# EAGLE board io-a-1 (EAGLE 9.6.2)
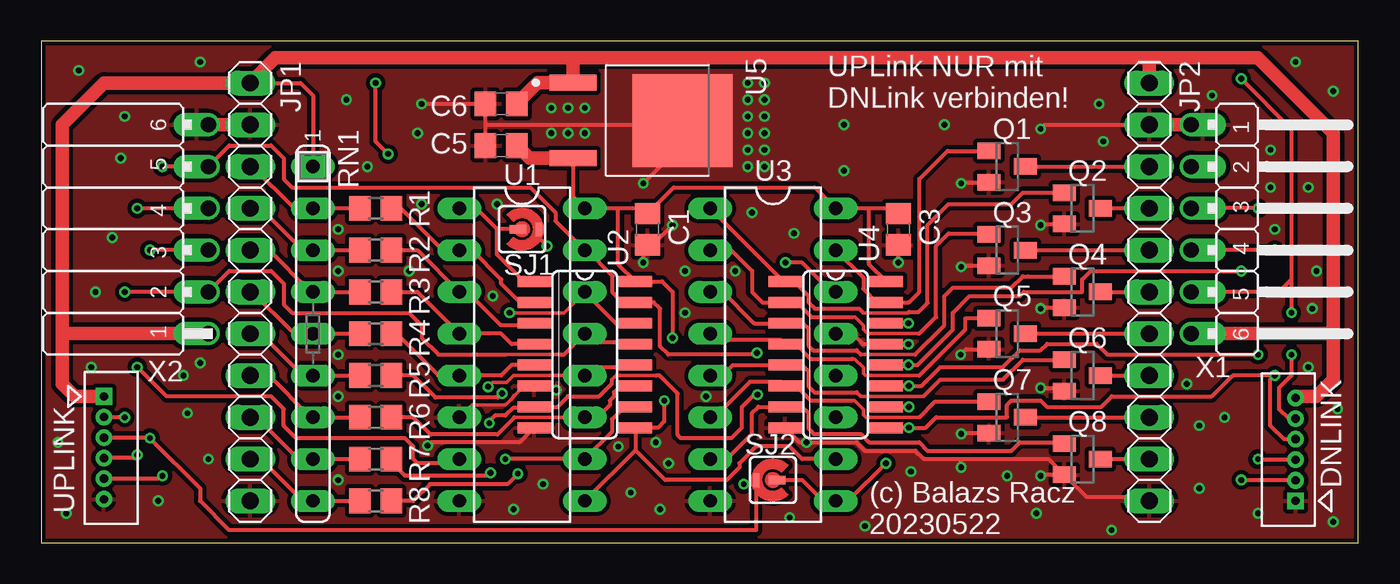
[diagram p0: board, top side]
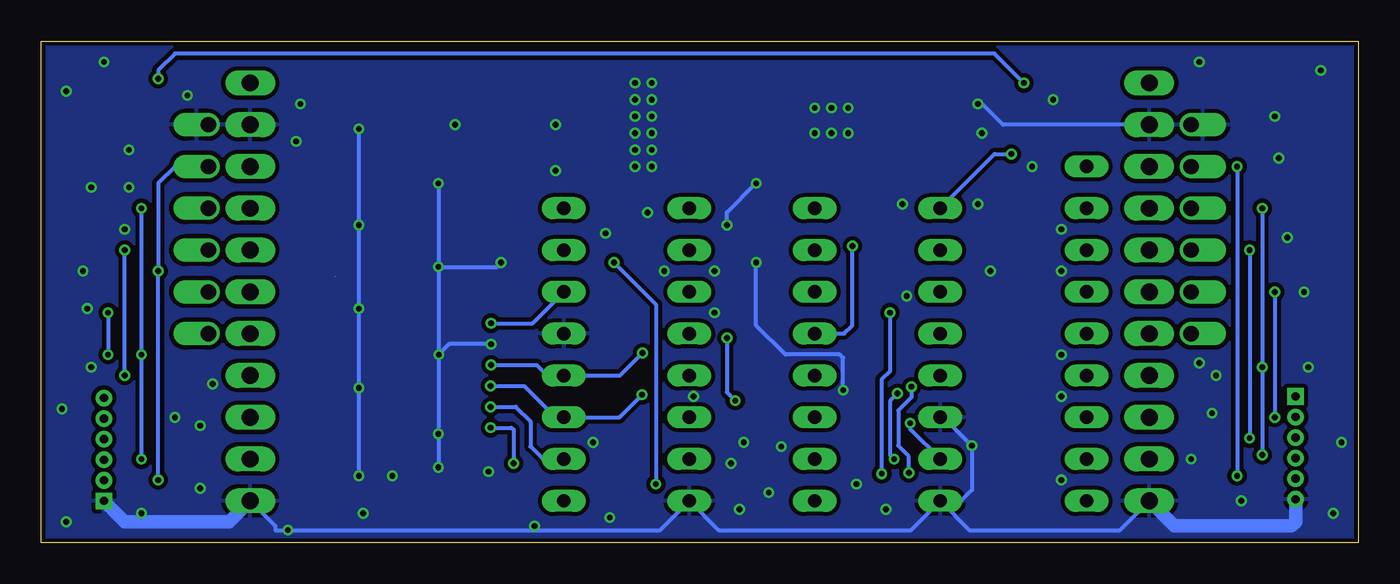
[diagram p1: board, bottom side, seen from below]

Size 80.01 x 30.48 mm. Coordinates in mm from the lower left corner, seen from the top.
Outline: 0,0 80.01,0 80.01,30.48 0,30.47 0,0
Copper layers (1*16): Top 0.035mm / dielectric 1.5mm / Bottom 0.035mm
Design rules "SeeedStudio_2layer_DRU_no_angle_20140221 *": minimum track width 6mil, minimum drill 12mil, track to track 8mil, track to pad 8mil, pad to pad 8mil, via to via 8mil, smd to smd 0mil, copper to edge 10mil, drill to drill 10mil, minimum pad ring 10mil, minimum via ring 6mil, stop-mask expansion 2mil, vias tented up to drill 100mil, thermal gap 10mil

## Footprints (pad centres in the part's own frame; a part is rotated, then mirrored left to right if it is on the bottom)
C0805 = smd 1.3 x 1.5: 1 -0.95,0; 2 0.95,0
1X11 = drill 1.016 long: 1 -12.7,0; 2 -10.16,0; 3 -7.62,0; 4 -5.08,0; 5 -2.54,0; 6 0,0; 7 2.54,0; 8 5.08,0; 9 7.62,0; 10 10.16,0; 11 12.7,0
SOT23 = smd 1 x 1.4: 1 -0.95,-1.1; 2 0.95,-1.1; 3 0,1.1
R0805 = smd 1.3 x 1.5: 1 -0.95,0; 2 0.95,0
SIL9 = drill 0.813 long: 1 -10.16,0; 2 -7.62,0; 3 -5.08,0; 4 -2.54,0; 5 0,0; 6 2.54,0; 7 5.08,0; 8 7.62,0; 9 10.16,0
SJ_RND2 = smd 1.016 x 0.508: P$1 -0.254,0 | smd 0.406 x 0.813: P$2 1.016,0
DIL16 = drill 0.813 long: 1 -8.89,-3.81; 2 -6.35,-3.81; 3 -3.81,-3.81; 4 -1.27,-3.81; 5 1.27,-3.81; 6 3.81,-3.81; 7 6.35,-3.81; 8 8.89,-3.81; 9 8.89,3.81; 10 6.35,3.81; 11 3.81,3.81; 12 1.27,3.81; 13 -1.27,3.81; 14 -3.81,3.81; 15 -6.35,3.81; 16 -8.89,3.81
SO16 = smd 0.66 x 2.032: 1 -4.445,-3.073; 2 -3.175,-3.073; 3 -1.905,-3.073; 4 -0.635,-3.073; 5 0.635,-3.073; 6 1.905,-3.073; 7 3.175,-3.073; 8 4.445,-3.073; 9 4.445,3.073; 10 3.175,3.073; 11 1.905,3.073; 12 0.635,3.073; 13 -0.635,3.073; 14 -1.905,3.073; 15 -3.175,3.073; 16 -4.445,3.073
DPAK229P990X238-4N = smd 0.97 x 2.83: 1 -2.29,-4.14; 3 2.29,-4.14 | smd 5.63 x 6.09: 2 0,2.51
JP6F = drill 0.914 offset: 1 -8.89,0; 2 -6.35,0; 3 -3.81,0; 4 -1.27,0; 5 1.27,0; 6 3.81,0
JP6F-FEM = drill 0.914 offset: 1 -8.89,0; 2 -6.35,0; 3 -3.81,0; 4 -1.27,0; 5 1.27,0; 6 3.81,0
CON_530470610_MOL = drill 0.5 pad 0.85 square: 1 0,0 | drill 0.5 pad 0.85: 2 -1.25,0; 3 -2.5,0; 4 -3.75,0; 5 -5,0; 6 -6.25,0

## Placement (x,y rotation side)
C1  [C0805]  36.83,19.05 270 top
C3  [C0805]  52.07,19.05 270 top
C5  [C0805]  27.94,24.13 180 top
C6  [C0805]  27.94,26.67 180 top
JP1  INPUTS  [1X11]  12.7,15.24 270 top
JP2  OUTPUTS  [1X11]  67.31,15.24 270 top
Q1  BSS123  [SOT23]  58.67,22.86 270 top
Q2  BSS123  [SOT23]  63.25,20.32 270 top
Q3  BSS123  [SOT23]  58.67,17.78 270 top
Q4  BSS123  [SOT23]  63.25,15.24 270 top
Q5  BSS123  [SOT23]  58.67,12.7 270 top
Q6  BSS123  [SOT23]  63.25,10.16 270 top
Q7  BSS123  [SOT23]  58.67,7.62 270 top
Q8  BSS123  [SOT23]  63.25,5.08 270 top
R1  [R0805]  20.32,20.32 180 top
R2  [R0805]  20.32,17.78 180 top
R3  [R0805]  20.32,15.24 180 top
R4  [R0805]  20.32,12.7 180 top
R5  [R0805]  20.32,10.16 180 top
R6  [R0805]  20.32,7.62 180 top
R7  [R0805]  20.32,5.08 180 top
R8  [R0805]  20.32,2.54 180 top
RN1  10K  [SIL9]  16.51,12.7 270 top
SJ1  [SJ_RND2]  29.21,19.05 0 top
SJ2  [SJ_RND2]  44.45,3.81 180 top
U1  74HC166  [DIL16]  29.21,11.43 270 top
U2  74HC166  [SO16]  33.02,11.43 270 top
U3  74HC595  [DIL16]  44.45,11.43 270 top
U4  74HC595  [SO16]  48.26,11.43 270 top
U5  MC7805BDTRKG  [DPAK229P990X238-4N]  36.45,25.65 270 top
X1  DNLINK  [JP6F]  69.85,16.51 270 top
X2  UPLINK  [JP6F-FEM]  10.16,21.59 90 top
X3  MOLEX_530470610CON_530470610_MOL  [CON_530470610_MOL]  3.81,8.89 90 top
X4  MOLEX_530470610CON_530470610_MOL  [CON_530470610_MOL]  76.2,2.54 270 top

## Library data of the parts
C1 C3 C5 C6 = rcl; SPICEPREFIX: C
JP1 JP2 = pinhead
Q1-Q8 = transistor-small-signal
R1-R8 = rcl; SPICEPREFIX: R
RN1 = resistor-sil; OC_FARNELL: unknown; OC_NEWARK: unknown
SJ1 SJ2 U1-U4 = trainlib
U5 = MC7805BDTRKG; MANUFACTURER: ON Semiconductor; PARTREV: 27; STANDARD: IPC-7351B
X1 X2 = eagleparts
X3 X4 = eagleparts; COPYRIGHT: Copyright (C) 2023 Ultra Librarian. All rights reserved.; MANUFACTURER_PART_NUMBER: 530470610; MFR_NAME: Molex Connector Corporation

## Nets
+5V: C1.1 C3.1 C5.1 U1.9 U1.16 U2.9 U2.16 U3.10 U3.16 U4.10 U4.16 U5.3
+12V: C6.1 JP1.1 JP2.1 RN1.1 U5.1 X1.6 X2.1 X3.1 X4.6
GND: C1.2 C3.2 C5.2 C6.2 JP1.2 JP1.11 JP2.2 JP2.11 Q1.2 Q2.2 Q3.2 Q4.2 Q5.2 Q6.2 Q7.2 Q8.2 U1.6 U1.8 U2.6 U2.8 U3.8 U3.13 U4.8 U4.13 U5.2 X1.1 X2.6 X3.6 X4.1
LATCH: U1.15 U2.15 U3.12 U4.12 X1.2 X2.5 X3.5 X4.2
MISO-DN: SJ1.P$1 U1.1 U2.1 X1.5 X4.5
MISO-UP: SJ1.P$2 U1.13 U2.13 X2.2 X3.2
MOSI-DN: SJ2.P$1 U3.9 U4.9 X1.4 X4.4
MOSI-UP: SJ2.P$2 U3.14 U4.14 X2.3 X3.3
N$19: JP2.6 Q4.3
N$20: JP2.5 Q3.3
N$21: JP2.4 Q2.3
N$22: JP2.3 Q1.3
N$27: JP1.3 R1.2 RN1.2
N$28: JP1.4 R2.2 RN1.3
N$29: JP1.5 R3.2 RN1.4
N$30: JP1.6 R4.2 RN1.5
N$31: JP1.7 R5.2 RN1.6
N$32: JP1.8 R6.2 RN1.7
N$33: JP1.9 R7.2 RN1.8
N$34: JP1.10 R8.2 RN1.9
N$35: JP2.7 Q5.3
N$36: JP2.8 Q6.3
N$37: JP2.9 Q7.3
N$38: JP2.10 Q8.3
PA: Q1.1 U3.15 U4.15
PB: Q2.1 U3.1 U4.1
PC: Q3.1 U3.2 U4.2
PD: Q4.1 U3.3 U4.3
PE: Q5.1 U3.4 U4.4
PF: Q6.1 U3.5 U4.5
PG: Q7.1 U3.6 U4.6
PH: Q8.1 U3.7 U4.7
QA: R1.1 U1.2 U2.2
QB: R2.1 U1.3 U2.3
QC: R3.1 U1.4 U2.4
QD: R4.1 U1.5 U2.5
QE: R5.1 U1.10 U2.10
QF: R6.1 U1.11 U2.11
QG: R7.1 U1.12 U2.12
QH: R8.1 U1.14 U2.14
SCK: U1.7 U2.7 U3.11 U4.11 X1.3 X2.4 X3.4 X4.3

## Tracks (layer width: path | path; a pad name or v marks a point on that pad's centre or on a via)
+5V  (via drill 0.35)
  Top 0.254: 36.09,5.61 U2.9 37.47,6.99 37.85,7.37 v37.85,8.64 | 36.09,5.61 U1.9 | 35.05,20.32 U1.16 32.31,21.03 U5.3 | 35.05,20.32 36.51,20.32 C1.1 38.42,21.59 46.99,21.59 U3.16 50.29,20.32 | 35.05,20.32 35.05,16.92 U2.16 37.72,15.88 38.35,15.24 v38.35,12.45 | U4.16 50.29,16.92 50.29,20.32 | 50.29,20.32 51.75,20.32 C3.1 | U4.10 v52.7,8.26 v52.7,8.25 | U3.10 46.23,5.08 45.47,5.84 43.43,5.84 42.42,4.83 42.42,4.57 41.66,3.81 37.9,3.81 36.09,5.61
  Top 0.813: C5.1 29.66,23.36 U5.3
  Bottom 0.254: v52.7,8.25 51.18,8.25 50.29,7.37 50.29,5.84 49.53,5.08 U3.10 | v38.35,12.45 38.35,9.14 v37.85,8.64
+12V
  Top 0.254: JP1.1 15.75,27.94 16.51,27.18 RN1.1
  Top 0.813: X2.1 1.52,12.7 1.27,12.95 | 1.27,12.95 1.27,25.4 3.81,27.94 JP1.1 14.22,29.46 32.06,29.46 | 32.06,29.46 32.31,29.21 U5.1 30.16,27.94 C6.1 | JP2.1 67.31,29.46 | 32.06,29.46 67.31,29.46 | 67.31,29.46 73.91,29.46 78.49,24.89 78.49,12.95 | 78.49,12.95 78.23,12.7 X1.6 | X4.6 76.3,8.89 77.47,8.89 78.49,9.91 78.49,12.95 | X3.1 2.03,8.89 1.27,9.65 1.27,12.95
GND  (via drill 0.35)
  Top 0.203: U1.6 26.16,8.38 28.22,8.38 28.62,8.79 28.62,8.81 29.33,9.53 U2.6
  Top 0.254: U2.8 29.06,6.1 23.67,6.1 v23.47,5.89 | U3.13 49.28,12.7 49.91,12.06 U4.13 v52.68,12.06 v52.68,12.07 | U4.8 46.08,6.1 49.53,6.1 50.04,5.59 53.09,5.59 53.59,5.08 55.88,5.08 | Q8.2 61.2,5.08 55.88,5.08 | U2.6 31.04,9.53 v31.29,9.27 | v36.58,17.02 36.58,17.85 C1.2 37.15,18.1 v38.35,19.3 | v23.11,26.67 C6.2 26.99,25.4 | C5.2 26.99,25.4 | 38.78,25.48 38.7,25.4 26.99,25.4 | 38.78,25.48 U5.2 | v36.58,21.84 38.78,24.05 38.78,25.48 | Q8.2 63.48,2.79 67.06,2.79 JP2.11 | Q1.2 57.51,21.84 v55.88,21.84 | v55.88,16.76 55.95,16.83 Q3.2 | v52.07,17.02 C3.2 | v55.86,11.43 56.18,11.75 Q5.2 | v55.88,6.6 55.95,6.67 Q7.2 | v55.88,4.57 55.88,5.08 | Q8.2 60.77,4.13 v60.71,4.06 | v60.71,9.4 61.96,9.4 Q6.2 | v60.71,14.22 60.77,14.29 Q4.2 | v60.71,19.3 60.77,19.37 Q2.2 | v60.71,25.15 60.96,25.4 JP2.2
  Top 0.813: X2.6 JP1.2 | X1.1 JP2.2
  Bottom 0.254: U1.6 25.2,7.62 v23.47,5.89 23.47,3.2 24.13,2.54 U1.8 | JP2.11 65.79,1.02 65.79,0.76 42.42,0.76 U3.8 38.86,0.76 27.18,0.76 U1.8 | U1.8 23.62,0.76 14.48,0.76 JP1.11 | v31.29,9.27 31.29,11.23 31.5,11.43 34.8,11.43 36.58,13.21 v36.58,17.02 | JP1.2 21.59,25.4 22.86,26.67 v23.11,26.67 | v38.35,19.3 38.35,20.07 v36.58,21.84 | v55.88,21.84 v55.88,16.76 | v55.88,16.76 52.32,16.76 v52.07,17.02 | v55.88,16.76 55.88,11.46 v55.86,11.43 | v55.86,11.43 55.86,6.63 v55.88,6.6 v55.88,4.57 | v60.71,4.06 v60.71,9.4 v60.71,14.22 v60.71,19.3 v60.71,25.15 | v52.68,12.07 55.22,12.07 v55.86,11.43
  Bottom 0.813: JP2.11 68.58,1.27 74.93,1.27 X4.1 | JP1.11 11.18,1.02 4.06,1.02 3.81,1.27 X3.6
  other vias: 42.93,26.92 42.93,25.91 42.93,24.89 42.93,23.88 42.93,22.86 43.94,26.92 43.94,25.91 43.94,24.89 43.94,23.88 43.94,22.86 30.99,26.42 32,26.42 33.02,26.42 30.99,24.89 32,24.89 33.02,24.89 48.77,25.4 54.86,25.4 64.26,26.67 64.52,24.38 18.54,26.92 19.81,22.86 22.86,24.89 5.08,25.91 4.83,23.37 4.32,18.54 2.29,28.7 9.65,29.21 3.3,15.24 9.65,10.92 8.64,10.16 8.89,7.87 10.16,5.08 3.05,10.67 1.02,6.1 1.52,1.78 7.11,2.54 28.7,2.03 30.48,3.56 18.03,3.81 18.03,8.89 18.03,11.43 18.03,16.51 22.35,16.51 18.03,19.05 23.11,20.57 27.69,20.57 27.43,14.99 37.34,6.1 38.1,4.83 35.81,3.05 37.59,2.03 45.47,1.52 50.04,1.02 52.83,4.32 60.45,1.78 65.02,0.76 70.36,7.11 71.88,7.62 70.36,3.3 73.91,1.78 78.49,1.27 78.74,8.13 76.96,10.67 77.22,14.22 77.47,16.51 76.96,21.59 74.68,23.88 71.12,27.18 74.68,21.59 74.93,19.05 76.2,29.21 78.49,27.43 69.6,9.65 58.67,4.06 40.39,8.89 39.12,13.97 39.12,16.51 42.16,16.51 43.18,20.07 45.72,18.8 48.77,22.61 42.93,27.94 43.94,27.94 35.05,5.84 46.48,6.1
  pour Top (isolate 0.254): 0.25,30.23 0.25,0.25 79.76,0.25 79.76,30.23
  pour Bottom (isolate 0.254): 0.25,0.25 0.25,30.23 79.76,30.23 79.76,0.25
  pour Top (rank 2, no thermals): 35.05,28.7 35.05,22.35 42.93,22.35 42.93,28.7
LATCH  (via drill 0.35)
  Top 0.254: U4.12 v52.68,10.79 53.21,10.79 55.37,12.95 55.37,13.97 56.39,14.99 59.44,14.99 59.69,15.24 63.25,15.24 63.25,16 63.75,16.51 v72.9,16.51 | v43.48,11.53 43.38,11.43 38.1,11.43 37.59,11.94 37.59,14.22 37.21,14.61 U2.15 35.31,14.61 34.72,15.19 34.72,16.2 33.15,17.78 U1.15 31.24,19.56 31.24,20.07 29.72,21.59 15.24,21.59 14.73,22.1 14.73,23.37 13.97,24.13 11.43,24.13 X2.5 v7.37,22.86 | X4.2 72.92,3.79 v72.9,3.81 | v7.37,4.06 7.19,3.89 X3.5
  Bottom 0.254: v52.68,10.79 49.91,10.79 49.28,10.16 U3.12 44.86,10.16 v43.48,11.53 | X1.2 71.88,22.86 72.9,21.84 v72.9,16.51 v72.9,3.81 | v7.37,22.86 v7.37,4.06
MISO-DN  (via drill 0.35)
  Top 0.254: SJ1.P$1 27.69,19.05 | U1.1 26.42,20.32 27.69,19.05 | U2.1 29.82,16 29.21,16 27.69,17.53 27.69,19.05 | v21.08,23.62 20.32,24.38 v20.32,27.94 | X1.5 75.18,15.24 75.95,16 | v72.9,28.19 75.95,25.15 75.95,16 | 75.95,16 v75.95,13.97 | v75.95,11.43 75.95,10.16 75.18,9.4 75.18,8.13 75.77,7.54 X4.5
  Bottom 0.254: U1.1 22.1,23.62 v21.08,23.62 | v20.32,27.94 22.1,29.72 71.88,29.72 72.9,28.7 v72.9,28.19 | v75.95,13.97 v75.95,11.43
MISO-UP  (via drill 0.35)
  Top 0.203: 28.19,11.43 31.5,11.43
  Top 0.254: U2.13 35.97,12.19 33.53,12.19 U1.13 31.75,11.43 31.5,11.43 | 28.19,11.43 24.13,11.43 23.11,12.45 23.11,13.21 22.35,13.97 15.24,13.97 14.73,14.48 14.73,15.75 13.97,16.51 11.43,16.51 X2.2 v5.08,15.24 | v30.73,18.03 30.23,18.54 SJ1.P$2 | v5.08,7.62 3.83,7.62 X3.2
  Bottom 0.254: U1.13 31.24,12.7 30.73,13.21 v30.73,18.03 | v5.08,15.24 v5.08,7.62 | 3.83,7.62 X3.2
MOSI-DN  (via drill 0.35)
  Top 0.254: U4.9 v52.7,6.99 53.72,6.99 54.36,7.62 58.67,7.62 58.67,8.38 58.93,8.64 60.71,8.64 61.09,8.26 64.39,8.26 65.02,8.89 71.12,8.89 72.39,10.16 v74.93,10.16 74.68,9.91 74.68,7.11 75.5,6.29 X4.4 | v51.31,4.83 49.02,2.54 U3.9 47.5,2.54 46.23,3.81 SJ2.P$1 | v74.93,17.78 X1.4
  Bottom 0.254: v52.7,6.99 51.44,6.99 51.31,6.86 v51.31,4.83 | v74.93,10.16 v74.93,17.78
MOSI-UP  (via drill 0.35)
  Top 0.254: U4.14 v52.68,13.34 | U3.14 48.01,15.24 46.23,17.02 v45.21,17.02 | v42.67,3.56 43.43,3.56 SJ2.P$2 43.43,0.76 11.43,0.76 9.65,2.54 9.65,3.3 v6.6,6.35 6.56,6.39 X3.3 | X2.3 v6.6,17.78
  Bottom 0.254: v52.68,13.34 50.16,13.34 U3.14 | v45.21,17.02 42.67,14.48 v42.67,3.56 | v6.6,17.78 v6.6,6.35
N$19
  Top 0.254: Q4.3 JP2.6
N$20
  Top 0.254: Q3.3 JP2.5
N$21
  Top 0.254: Q2.3 JP2.4
N$22
  Top 0.254: Q1.3 JP2.3
N$27
  Top 0.254: R1.2 RN1.2 15.37,20.32 12.83,22.86 JP1.3
N$28
  Top 0.254: R2.2 RN1.3 15.88,17.78 13.34,20.32 JP1.4
N$29
  Top 0.254: R3.2 RN1.4 16.38,15.24 13.84,17.78 JP1.5
N$30
  Top 0.254: R4.2 RN1.5 15.37,12.7 12.83,15.24 JP1.6
N$31
  Top 0.254: R5.2 RN1.6 15.88,10.16 13.34,12.7 JP1.7
N$32
  Top 0.254: R6.2 RN1.7 16.38,7.62 13.84,10.16 JP1.8
N$33
  Top 0.254: R7.2 RN1.8 15.62,5.08 13.08,7.62 JP1.9
N$34
  Top 0.254: R8.2 RN1.9 15.88,2.54 13.34,5.08 JP1.10
N$35
  Top 0.254: Q5.3 JP2.7
N$36
  Top 0.254: Q6.3 JP2.8
N$37
  Top 0.254: Q7.3 JP2.9
N$38
  Top 0.254: Q8.3 JP2.10
PA
  Top 0.254: Q1.1 55.05,23.81 53.34,22.1 53.34,15.24 52.7,14.61 U4.15 50.75,14.61 49.94,15.42 49.94,16.1 U3.15
PB
  Top 0.203: 49.94,13.97 52.68,13.97 52.73,14.02
  Top 0.254: 49.94,13.97 49.68,14.22 46.99,14.22 46.61,14.61 46.61,15 45.73,15.88 U4.1 45.09,15.88 U3.1 | 52.73,14.02 53.29,14.02 53.85,14.58 53.85,19.3 55.12,20.57 58.93,20.57 59.62,21.27 Q2.1
PC
  Top 0.203: 49.28,13.72 49.43,13.72 49.94,13.21 49.94,12.95 50.19,12.7 53.29,12.7 53.34,12.75
  Top 0.254: 49.28,13.72 46.79,13.72 45.9,14.61 U4.2 43.81,14.61 43.18,15.24 43.18,16.51 41.91,17.78 U3.2 | 53.29,12.7 53.34,12.7 54.36,13.72 54.36,18.03 55.12,18.8 57.51,18.8 Q3.1
PD  (1 unrouted)
  Top 0.203: 49.78,11.43 53.09,11.43
  Top 0.254: 49.78,11.43 49.53,11.68 46.89,11.68 46.61,11.96 46.61,13.01 46.28,13.34 U4.3 43.31,13.34 41.4,15.24 U3.3 | 53.09,11.43 54.86,13.21 54.86,14.99 55.37,15.49 58.93,15.49 59.62,16.19 59.94,16.19 Q4.1
PE
  Top 0.203: 49.28,11.18 49.4,11.18 49.94,10.64 49.94,10.29 50.06,10.16 53.34,10.16
  Top 0.254: 49.28,11.18 46.74,11.18 45.85,12.06 U4.4 44.93,12.32 41.78,12.32 41.4,12.7 U3.4 | 53.34,10.16 56.13,12.95 56.13,13.61 56.17,13.65 Q5.1
PF
  Top 0.203: 49.78,8.89 53.59,8.89
  Top 0.254: 49.78,8.89 49.53,9.14 46.97,9.14 46.61,9.5 46.61,10.41 46.23,10.79 U4.5 42.04,10.79 41.4,10.16 U3.5 | 53.59,8.89 54.61,9.91 58.42,9.91 59.62,11.11 Q6.1
PG
  Top 0.203: 49.28,8.64 49.4,8.64 49.94,8.1 49.94,7.77 50.09,7.62 53.34,7.62
  Top 0.254: 49.28,8.64 46.74,8.64 45.85,9.53 U4.6 44.93,9.78 43.05,9.78 40.89,7.62 U3.6 | Q7.1 54.29,8.57 53.34,7.62
PH
  Top 0.254: Q8.1 62.08,6.1 59.44,6.1 58.93,5.59 53.85,5.59 53.34,6.1 50.29,6.1 49.78,6.6 46.94,6.6 46.61,6.93 46.61,7.87 46.23,8.26 U4.7 43.56,8.26 43.18,7.87 43.18,6.6 41.66,5.08 U3.7
QA
  Top 0.254: R1.1 21.84,20.32 24.38,17.78 U1.2 26.16,17.78 27.94,16 27.94,15.75 29.08,14.61 U2.2
QB
  Top 0.254: R2.1 22.86,17.78 U1.3 25.91,15.24 27.94,13.21 29.82,13.21 U2.3
QC
  Top 0.254: R3.1 22.86,15.24 U1.4 27.94,12.7 28.57,12.06 U2.4
QD
  Top 0.254: R4.1 21.59,12.7 24.13,10.16 U1.5 27.94,10.16 28.57,10.79 U2.5
QE  (via drill 0.35)
  Top 0.254: U2.10 35.84,8.26 35.71,8.13 35.31,8.13 34.67,7.49 34.67,6.73 U1.10 v28.19,5.08 | v27.99,9.07 27.74,8.81 23.95,8.81 22.61,10.16 R5.1
  Bottom 0.254: v27.99,9.07 28.45,8.61 28.45,5.33 v28.19,5.08
QF
  Top 0.203: U1.11 28.75,7.62
  Top 0.254: U2.11 35.18,9.53 34.8,9.14 34.8,8.89 34.54,8.64 34.54,8.38 33.78,7.62 U1.11 | 28.75,7.62 27.71,6.58 23.65,6.58 22.61,7.62 R6.1
QG  (via drill 0.35)
  Top 0.203: U1.12 28.7,10.16 28.27,9.73 27.41,9.73 v27.15,9.47
  Top 0.254: U1.12 33.53,10.67 35.97,10.67 U2.12 | v27.3,4.24 27.13,4.06 22.1,4.06 21.27,4.89 R7.1
  Bottom 0.254: v27.15,9.47 27.15,8.81 27.94,8.03 27.94,5.89 27.33,5.28 27.33,4.27 v27.3,4.24
QH  (via drill 0.35)
  Top 0.203: U1.14 31.75,13.97 v28.45,13.97
  Top 0.254: U2.14 34.93,13.34 U1.14 | v28.96,4.19 28.32,3.56 23.62,3.56 22.61,2.54 R8.1
  Bottom 0.254: v28.45,13.97 28.45,10.41 28.96,9.91 v28.96,4.19
SCK  (via drill 0.35)  (1 unrouted)
  Top 0.203: 34.67,9.91 34.93,10.16 37.34,10.16
  Top 0.254: v27.23,7.26 27.13,7.26 27.58,7.72 28.19,7.72 28.65,8.18 29.87,8.18 U2.7 31.37,8.26 32,8.89 33.9,8.89 34.67,9.66 34.67,9.91 | U4.11 v52.7,9.53 53.47,9.53 54.61,10.67 58.42,10.67 59.44,11.68 60.71,11.68 61.11,12.09 64.11,12.09 64.77,11.43 v73.91,11.43 | U1.7 25.15,4.83 22.86,4.83 22.61,5.08 22.61,5.84 22.1,6.35 15.49,6.35 14.73,7.11 14.73,8.13 13.97,8.89 7.62,8.89 v5.84,10.67 | v43.51,8.99 43.31,8.99 42.55,8.23 42.55,6.99 41.91,6.35 38.86,6.35 38.66,6.55 38.66,9.07 37.57,10.16 37.34,10.16 | v5.84,20.32 X2.4 | v73.91,20.32 X1.3 | X4.3 73.95,5.04 v73.91,5.08 | v5.84,5.33 5.65,5.14 X3.4
  Bottom 0.254: v27.23,7.26 27.23,6.91 U1.7 | v52.7,9.53 50.67,9.53 48.77,7.62 U3.11 44.88,7.62 v43.51,8.99 | v5.84,20.32 v5.84,10.67 v5.84,5.33 | v73.91,20.32 v73.91,11.43 v73.91,5.08

## Text on the board
tNames: UPLink NUR mit / DNLink verbinden! | DNLINK | UPLINK | (c) Balazs Racz / 20230522